# Altium PCB Copy of LMS.PcbDoc
Units mm, origin at the board's own origin, x right, y up, seen from the top; angles counter-clockwise.
Board outline 152.4 x 101.6 mm, 2 copper layers (Top Layer, Bottom Layer); 29 components, 25 nets, 119 pads, 22 vias.
Unrouted connection lines stored in the file: 31.
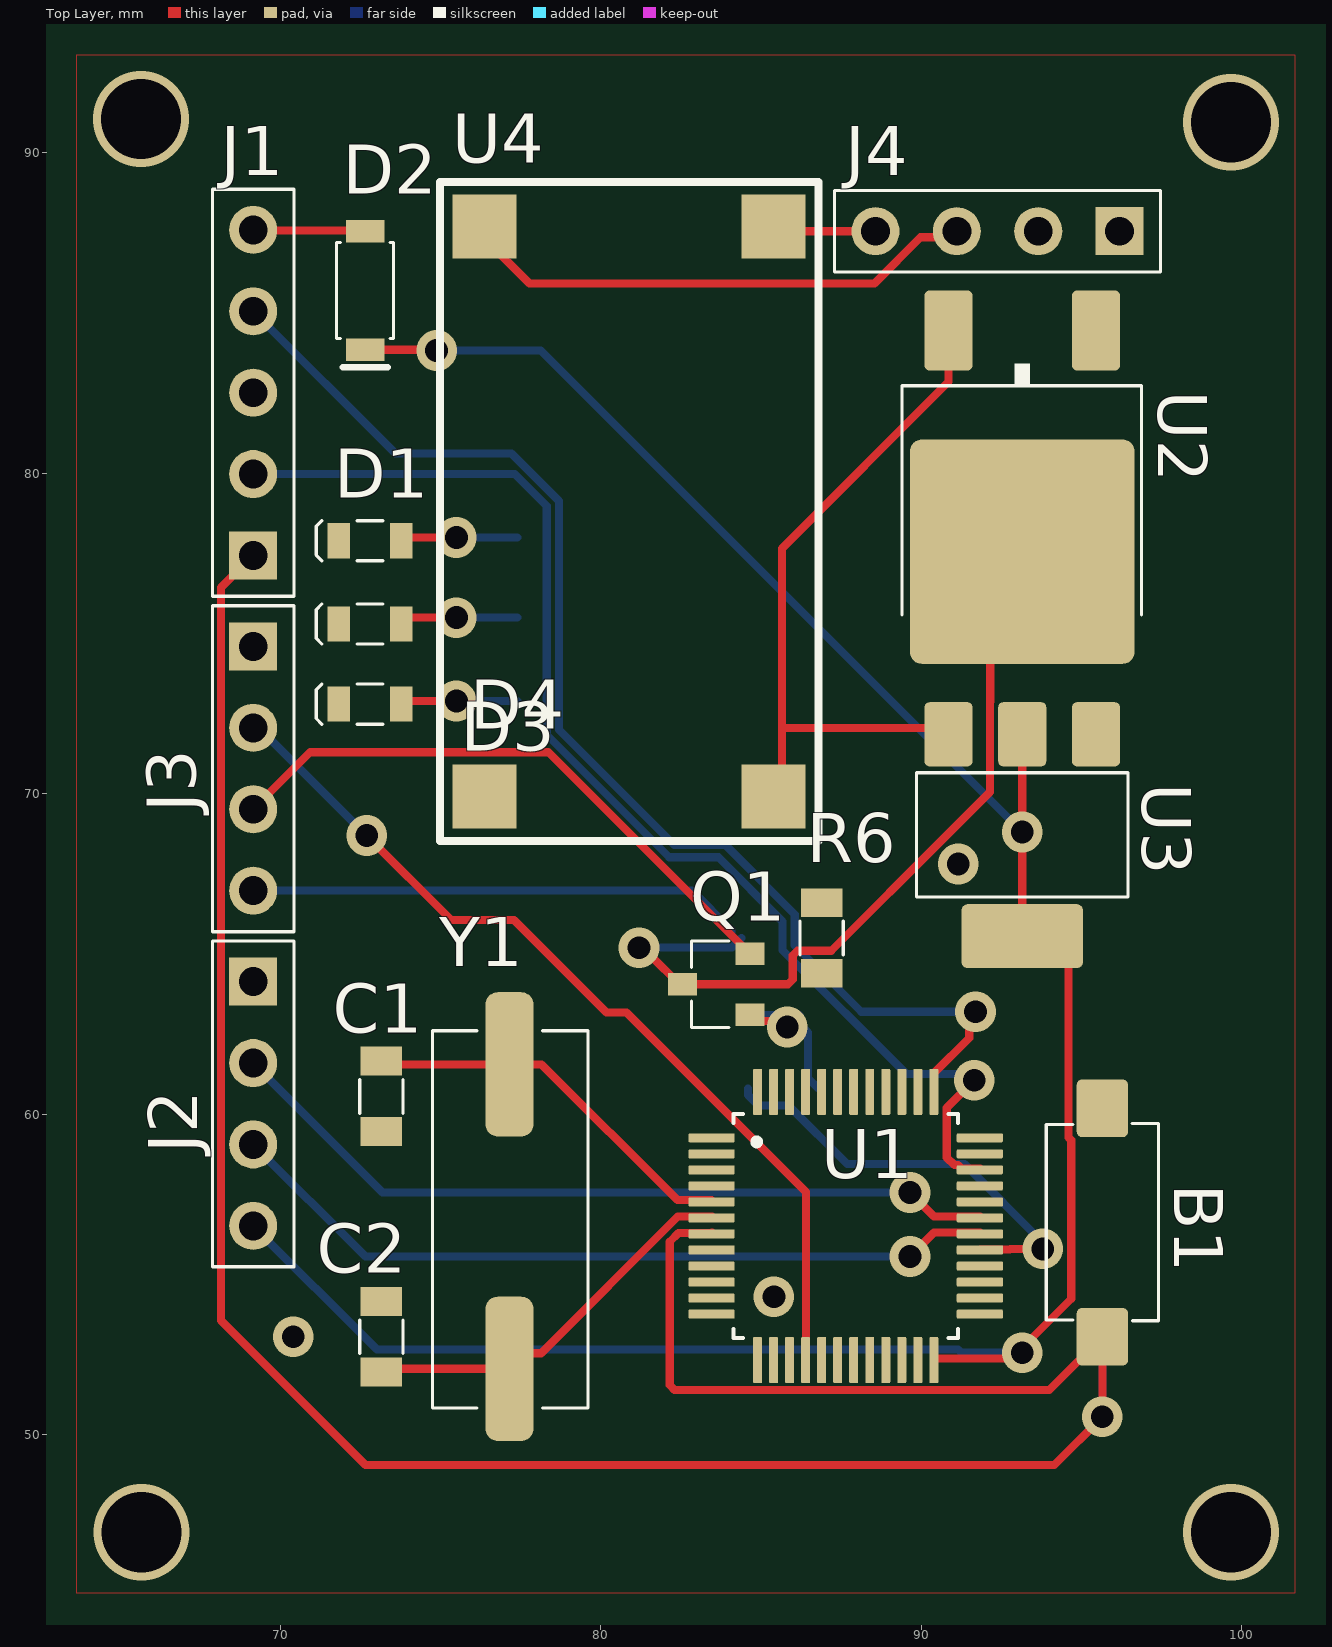
[diagram p0: Top Layer view]
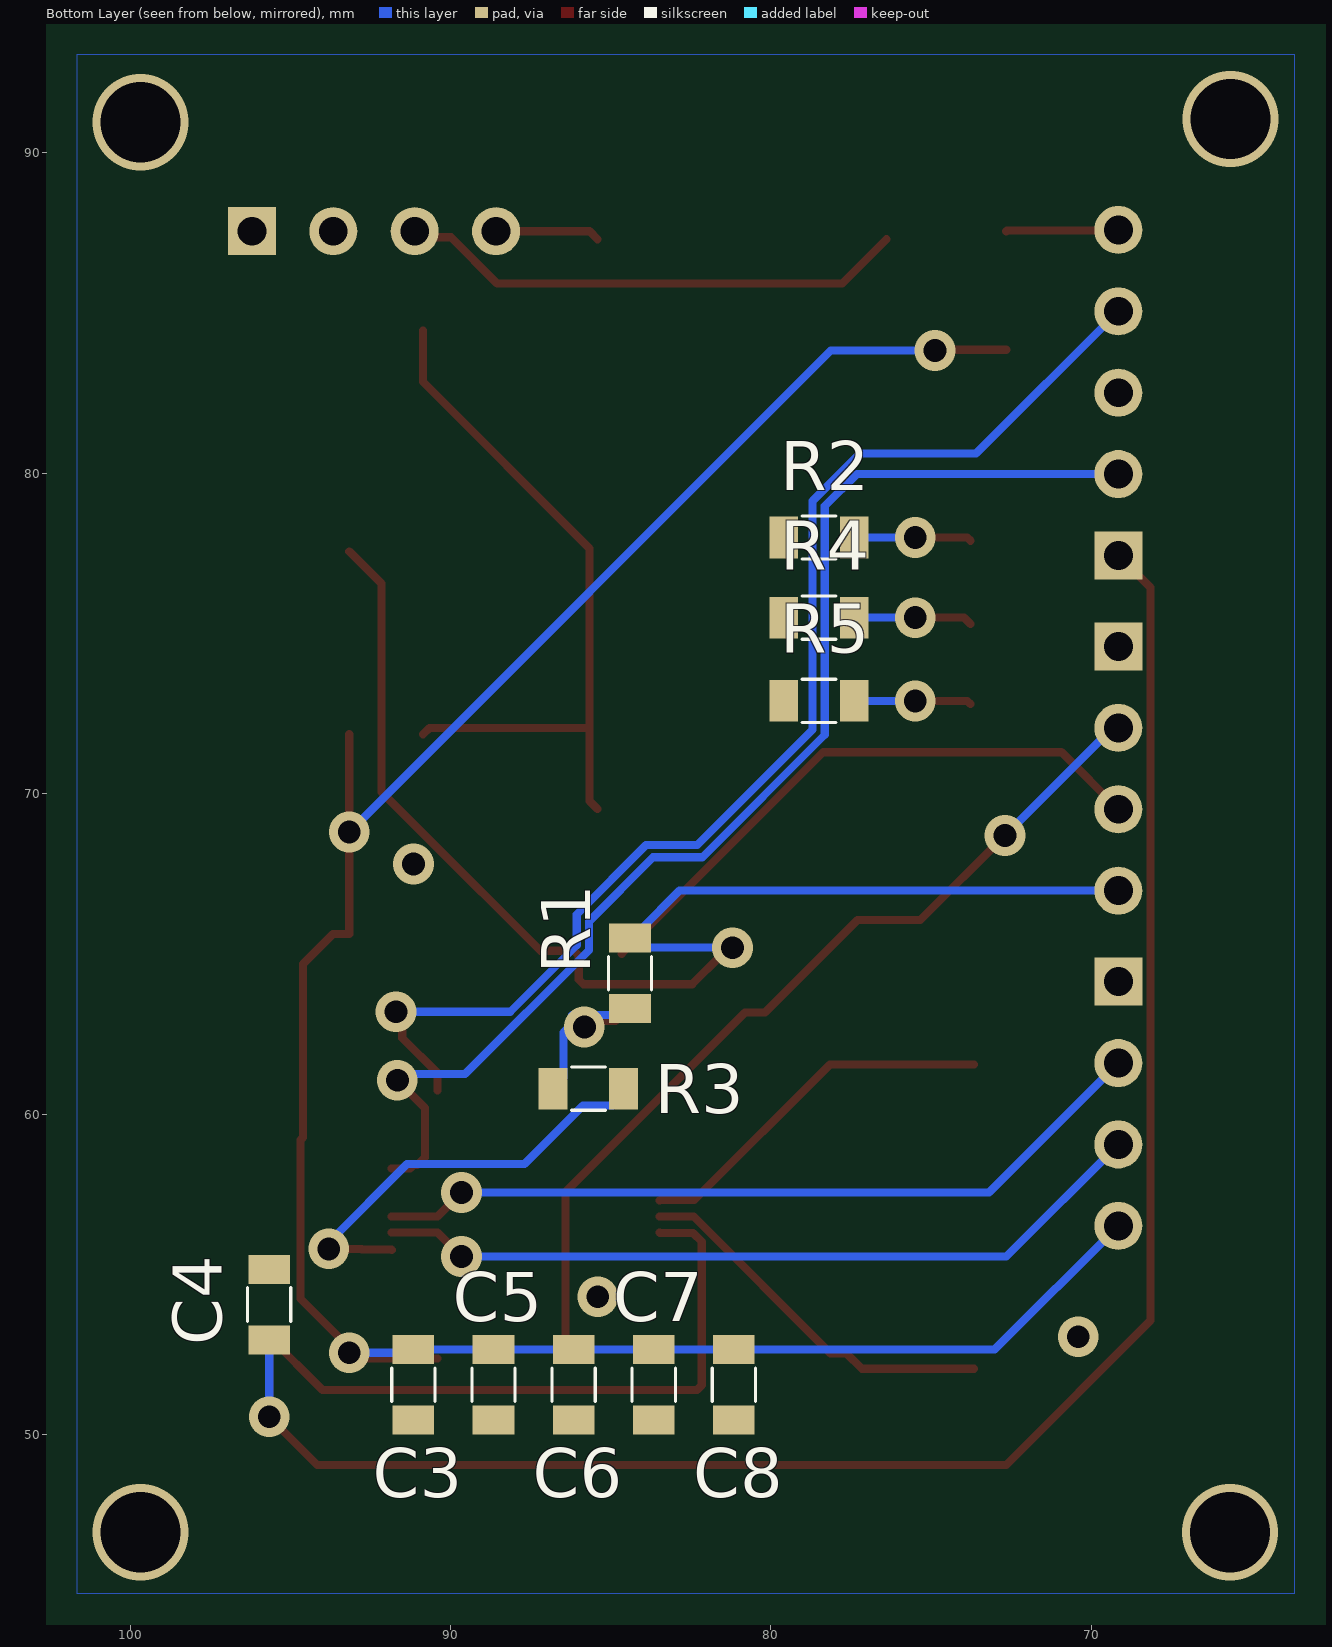
[diagram p1: Bottom Layer view, seen from below]

## Layer stack, top to bottom
Top Solder: solder mask 0.0102, Solder Resist, Dk 3.5
Top Layer: signal copper 0.0356
Dielectric 1: dielectric 0.32, FR-4, Dk 4.8
Bottom Layer: signal copper 0.0356
Bottom Solder: solder mask 0.0102, Solder Resist, Dk 3.5

## Board outline
25.4,25.4 177.8,25.4 177.8,127 25.4,127

## Design rules (kind name [scope] priority, off if disabled: settings)
AcuteAngle [All] p1: minimum=3.50000000000000E+0001 checktracksonly=FALSE
BoardOutlineClearance "BoardOutlineClearance 1" [All] p1: gap=0.25 ignorepadtopadclearanceinfootprint=FALSE except(0: Arc-SplitContinuation Track-SplitContinuation SMDPad-SplitContinuation THPad-SplitContinuation Via-SplitContinuation Fill-SplitContinuation Poly-SplitContinuation Region-SplitContinuation Text-SplitContinuation) // Milling
Clearance "Clearance-1 1/2 Oz" [All] p1: gap=0.125 ignorepadtopadclearanceinfootprint=FALSE except(0.2: Arc-Fill Arc-Poly Track-Fill Track-Poly SMDPad-SMDPad SMDPad-Fill SMDPad-Poly THPad-Fill THPad-Poly Via-Fill Via-Poly Fill-Fill Fill-Poly Poly-Poly Poly-Region Poly-Text; 0.25: Arc-Hole Track-Hole SMDPad-Hole THPad-Hole Via-Hole Fill-Hole Poly-Hole Region-Hole Text-Hole) // Standart
ComponentClearance [All] p1: gap=0.1 collisioncheckmode=3 verticalgap=0.1 showdistances=FALSE
DiffPairsRouting "DiffPairsRouting 1/2 Oz" [All] p1: maxlimit=0.254 minlimit=0.125 mostfreqgap=0.254 toplayer_minwidth=0.125 toplayer_maxwidth=0.381 toplayer_prefwidth=0.381 bottomlayer_minwidth=0.125 bottomlayer_maxwidth=0.381 bottomlayer_prefwidth=0.381 maxuncoupledlength=12.7
HoleSize "Minimum HoleSize" [IsPad] p1: absolutevalues=TRUE maxlimit=5.9 minlimit=0.6 maxpercent=80.000 minpercent=20.000
HoleSize "Minimum HoleSize VIA 1" [IsVia] p2: absolutevalues=TRUE maxlimit=5.9 minlimit=0.3 maxpercent=80.000 minpercent=20.000 // Standart
HoleToHoleClearance Hole2HoleClearance [All] p1: gap=0.25 allowstackedmicrovias=FALSE
MinimumAnnularRing "Minimum AR VIA Standart" [All] p1: minimumring=0.15
MinimumAnnularRing "Minimum AR PAD Standart" [All] p2: minimumring=0.2
MinimumSolderMaskSliver "SolderMask Bridge Standart" [All] p1: minsoldermaskwidth=0.15 // All Masks
PlaneClearance "PlaneClearance-1 1/2 Oz" [All] p1: clearance=0.2 // Standart
PlaneConnect "TermalConnect-1 1/2 Oz" [All] p1: planeconnectstyle=Relief reliefexpansion=0.2 reliefentries=4 reliefconductorwidth=0.2 reliefairgap=0.2 // Standart
PolygonConnect "PolygonConnect-1 1/2 Oz" [All] p1: thpad.connectstyle=Relief thpad.reliefconductorwidth=0.254 thpad.reliefentries=4 thpad.polygonreliefangle="90 Angle" thpad.airgapwidth=0.2 smdpad.connectstyle=Relief smdpad.reliefconductorwidth=0.254 smdpad.reliefentries=4 smdpad.polygonreliefangle="90 Angle" smdpad.airgapwidth=0.2 via.connectstyle=Direct via.reliefconductorwidth=0.254 via.reliefentries=4 via.polygonreliefangle="90 Angle" via.airgapwidth=0.254 // Standart
RoutingCorners [All] p1 off: cornerstyle=45-Degree minsetback=2.54 maxsetback=2.54
RoutingVias [All] p1: holewidth=0.4 width=0.8 viastyle="Through Hole" minholewidth=0.3 minwidth=0.6 maxholewidth=5.9 maxwidth=8.9
SilkToSilkClearance Silk2SilkClearance [All] p1 off: silktosilkclearance=0.15
SilkToSolderMaskClearance Silk2SolderMaskClearance [IsPad] p1 off: minsilkscreentomaskgap=0.15 clearancetoexposedcopper=TRUE
SolderMaskExpansion SolderMaskExpansion-1 [All] p1: expansion=0.05 istentingtop=FALSE // Standart
UnRoutedNet [All] p1: checkbadconnections=TRUE
Width "Width 1/2 Oz" [All] p1: maxlimit=10 minlimit=0.125 preferedwidth=0.254 checkconnectedcopper=TRUE
19 further rules are at their usual default settings.

## Components (designator, comment, footprint, x,y, rotation, side; value= is the part's Value field where it differs from the comment)
B1 "But" "BUTTON 6x3.5" 95.659,60.184 r0 top
C1 "3.9pF" "0805 Capicator" 73.159,60.559 r90 top
C2 "3.9pF" "0805 Capicator" 73.159,53.059 r270 top
C3 "0.1uF" "0805 Capicator" 91.159,51.559 r90 bottom
C4 "0.1uF" "0805 Capicator" 95.659,54.059 r270 bottom
C5 "0.1uF" "0805 Capicator" 88.659,51.559 r90 bottom
C6 "0.1uF" "0805 Capicator" 86.159,51.559 r90 bottom
C7 "0.1uF" "0805 Capicator" 83.659,51.559 r90 bottom
C8 "4.7uF" "0805 Capicator" 81.159,51.559 r90 bottom
D1 "LedG" "0805 Led" 72.8,77.9 r180 top
D2 "Diode" sod-123 72.659,87.559 r270 top
D3 "LedY" "0805 Led" 72.8,75.3 r180 top
D4 "LedR" "0805 Led" 72.8,72.8 r180 top
J1 "PLS 5x1" "PLS 5x1" 69.159,77.439 r90 top
J2 "PLS 4x1" "PLS 4x1" 69.159,64.139 r270 top
J3 "PLS 4x1" "PLS 4x1" 69.159,74.599 r270 top
J4 "PLS 4x1" "PLS 4x1" 96.199,87.559 r180 top
Q1 "MOSFET-P" SOT-23 84.659,63.109 r90 top
R1 "10k" "0805 Resistor" 84.4,64.4 r90 bottom
R2 "300" "0805 Resistor" 78.5,78 r180 bottom
R3 "20" "0805 Resistor" 85.7,60.8 r0 bottom
R4 "300" "0805 Resistor" 78.5,75.5 r180 bottom
R5 "300" "0805 Resistor" 78.5,72.9 r180 bottom
R6 "3.9k" "0805 Resistor" 86.9,65.5 r270 top
U1 "STM32F103C6T6" STM32F103C6T6 87.65,56.515 r0 top
U2 "LDO 5V" TO-252 93.159,84.459 r180 top
U3 "LDO 3.3V" SOT-223 93.159,71.859 r180 top
U4 "DC-DC" DC-DC 81.145,79.953 r270 top
Y1 "8MHz" hc-49sm 77.159,52.059 r90 top

## Footprints (in the part's own frame and the unit in brackets; to place one, negate y for a bottom-side part, rotate by r counter-clockwise, add the part's x,y. Pads: shape width x height; smd on the part's side, far side on the other; paste and mask are expansions set on the pad)
"0805 Capicator" [mm]
  rect 0.9x1.3 smd: 1(-1.1,0) 2(1.1,0)
  silkscreen extent -0.53,-0.67 0.53,0.67, body extent -1.05,-0.67 1.05,0.68, height 0.75
"0805 Led" [mm]
  rect 0.7x1.1 smd: 1(-0.975,0) 2(0.975,0)
  silkscreen extent -0.4,-0.63 1.68,0.63, body extent -1.01,-0.62 1.01,0.62, height 1.1
"0805 Resistor" [mm]
  rect 0.9x1.3 smd: 1(-1.1,0) 2(1.1,0)
  silkscreen extent -0.53,-0.67 0.53,0.67, body extent -1.05,-0.67 1.05,0.68, height 0.6
"BUTTON 6x3.5" [mm]
  rrect20% 1.6x1.8 smd: 1(0,0) 2(0,-7.125)
  silkscreen extent -1.75,-6.63 1.75,-0.48, body extent -1.75,-7.52 1.75,0.48, height 4.3
DC-DC [mm]
  rect 2x2 smd: 1(-7.747,4.254) 2(-7.747,-4.763) 3(10.033,4.255) 4(10.033,-4.762)
  silkscreen extent -9.14,-6.16 11.43,5.65
hc-49sm [mm]
  rrect50% 4.5x1.5 smd: 1(0,0) 2(9.5,0)
  silkscreen extent -1.23,-2.45 10.55,2.4, body extent -1.7,-2.44 11.1,2.39
"PLS 4x1" [mm] "Connector; Header; 5 Position"
  rect 1.5x1.5 hole 0.9: 1(0,0)
  round 1.5 hole 0.9: 2(2.54,0) 3(5.08,0) 4(7.62,0)
  silkscreen extent -1.27,-1.27 8.9,1.27, body extent -1.27,-1.3 8.89,1.24, height 8.6
"PLS 5x1" [mm] "Connector; Header; 5 Position"
  rect 1.5x1.5 hole 0.9: 1(0,0)
  round 1.5 hole 0.9: 2(2.54,0) 3(5.08,0) 4(7.62,0) 5(10.16,0)
  silkscreen extent -1.27,-1.27 11.43,1.27, body extent -1.28,-1.28 11.42,1.26, height 8.54
sod-123 [mm]
  rect 0.7x1.2 smd: 1(0,0) 2(3.7,0)
  silkscreen extent 0.35,-0.9 4.25,0.87, body extent 0,-0.8 3.7,0.8
SOT-23 [mm]
  rect 0.7x0.9 smd: 1(0,0) 2(1.9,0) 3(0.95,2.1)
  silkscreen extent -0.4,0.65 2.3,1.83, body extent -0.55,-0.17 2.45,2.23, height 1.1
SOT-223 [mm]
  rrect20% 1.5x2 smd: 1(-2.3,0) 2(0,0) 3(2.3,0)
  rrect20% 3.8x2 smd: 2(0,6.3)
  silkscreen extent -3.3,1.2 3.3,5.07, body extent -3.25,-0.23 3.25,6.73, height 1.7
STM32F103C6T6 [mm]
  rrect25% 1.44x0.28 smd: 1(-4.185,2.75) 2(-4.185,2.25) 3(-4.185,1.75) 4(-4.185,1.25) 5(-4.185,0.75) 6(-4.185,0.25) 7(-4.185,-0.25) 8(-4.185,-0.75) 9(-4.185,-1.25) 10(-4.185,-1.75) 11(-4.185,-2.25) 12(-4.185,-2.75) 25(4.185,-2.75) 26(4.185,-2.25) 27(4.185,-1.75) 28(4.185,-1.25) 29(4.185,-0.75) 30(4.185,-0.25) 31(4.185,0.25) 32(4.185,0.75) 33(4.185,1.25) 34(4.185,1.75) 35(4.185,2.25) 36(4.185,2.75)
  rrect25% 0.28x1.44 smd: 13(-2.75,-4.185) 14(-2.25,-4.185) 15(-1.75,-4.185) 16(-1.25,-4.185) 17(-0.75,-4.185) 18(-0.25,-4.185) 19(0.25,-4.185) 20(0.75,-4.185) 21(1.25,-4.185) 22(1.75,-4.185) 23(2.25,-4.185) 24(2.75,-4.185) 37(2.75,4.185) 38(2.25,4.185) 39(1.75,4.185) 40(1.25,4.185) 41(0.75,4.185) 42(0.25,4.185) 43(-0.25,4.185) 44(-0.75,4.185) 45(-1.25,4.185) 46(-1.75,4.185) 47(-2.25,4.185) 48(-2.75,4.185)
  silkscreen extent -3.5,-3.5 3.5,3.5, body extent -4.5,-4.5 4.5,4.5, height 0.72
TO-252 [mm]
  rrect20% 1.5x2.5 smd: 1(-2.3,0) 3(2.3,0)
  rrect10% 7x7 smd: 2(0,6.9)
  silkscreen extent -3.72,1.02 3.75,8.87, body extent -3.38,-0.65 3.35,9.45, height 2.37

## Part data
B1: library part Button, "Button 2 Conn SMD"
C1 C2: library part "Cap 39pF"
C3 C4 C5 C6 C7: library part "Cap 0.1uF"
C8: library part "Cap 4.7uF"
D1: library part "Led Green"
D2: library part "Diode Schottky", "0.5 A, Low Forward Voltage less than 385 mV, 400 mW Power Dissipation Package"
D3: library part "Led Yellow"
D4: library part "Led Red"
J1: library part "Conn 5", "Header, 5-Pin"
J2 J3 J4: library part "Conn 4", "Header, 4-Pin"
Q1: "P-Channel Power MOSFET 12V to 20V, Infineon"
R1: library part "Res 10k"
R2 R4 R5: library part "Res 300"
R3: library part "Res 20"
R6: library part "Res 3.9k"
U2: "LDO Regulator Pos 5V 1A"
U3: "LDO Regulator Pos 3.3V 1.3A 4-Pin(3+Tab) SOT-223 T/R"
Y1: library part "Crystal 8MHz", "Crystal. HC-49SM (US)"

## Via types
v1: diameter 1.27, hole 0.711, Top Layer to Bottom Layer, 18 vias
v2: diameter 3, hole 2.5, Top Layer to Bottom Layer, 4 vias

## Nets (pads, with @x,y where several pads share a name; then routed paths per layer and width w, separated by ;. In a path a pad name is that pad's centre, name@x,y a point inside that pad or via, vN(x,y) a via of type N, cw(c..) or ccw(c..) an arc to the next point about the centre after c; other vN are vias at no path point)
+3.3V: C3.2 C5.2 C6.2 C7.2 C8.2 D2.2 J2.4 U1.24 U3.2 | length 76.1
  Top Layer w0.254: D2.2 74.859,83.859 v1@74.909,83.809 ; U1.24@90.409,52.374 92.974,52.374 v1(93.159,52.559) 93.159,52.716 94.687,54.244 94.687,59.193 94.607,59.273 94.607,64.692 93.667,65.631 93.159,65.631 v1(93.159,68.809) U3.2@93.159,71.859
  Bottom Layer w0.254: J2.4 73.019,52.659 C8.2 C7.2 C6.2 C5.2 C3.2 91.259,52.559 v1(93.159,52.559) ; v1(74.884,83.834) 78.134,83.834 v1(93.159,68.809)
+5V: J3.4 Q1.3 R1.2 U2.2 | length 40.8
  Top Layer w0.254: J3.4 J3.4@69.261,66.877 ; v1@81.559,64.959 82.459,64.059 Q1.3 85.849,64.059 85.998,64.208 85.998,64.954 86.146,65.102 87.198,65.102 90.792,68.696 90.796,68.696 92.157,70.057 92.157,72.876 92.159,72.878 92.159,76.559 U2.2
  Bottom Layer w0.254: J3.4 82.857,66.979 84.079,65.757 R1.2@84.079,65.659 ; v1(81.2,65.2) 84.1,65.2 R1.2
+7.4V: U2.3 U3.3 U4.3 | length 22.5
  Top Layer w0.254: U4.3@85.413,69.526 85.659,69.772 85.659,72.059 ; U3.3 90.659,72.059 85.659,72.059 ; U2.3 90.859,82.859 85.659,77.659 85.659,72.059
+12V: J4.4 U4.1 | length 3.3
  Top Layer w0.254: U4.1@85.413,87.306 85.667,87.559 J4.4
GND: B1.1 C1.1 C2.1 C3.1 C4.1 C5.1 C6.1 C7.1 C8.1 D1.2 D3.2 D4.2 J1.3 J2.1 J3.1 R6.1 U1.8 U1.23 U1.35 U1.47 U2.1 U4.4
GND12: J4.3 U4.2 | length 16
  Top Layer w0.254: U4.2@76.396,87.306 77.777,85.925 88.544,85.925 89.988,87.369 90.929,87.369 J4.3
NetC1_2: C1.2 U1.5 Y1.2 | length 11.6
  Top Layer w0.254: C1.2@73.659,61.559 78.159,61.559 82.396,57.322 83.461,57.322 U1.5@83.474,57.309
NetC2_2: C2.2 U1.6 Y1.1 | length 11.8
  Top Layer w0.254: C2.2@73.659,52.059 Y1.1 77.641,52.541 78.141,52.541 82.409,56.809 U1.6@83.474,56.809
NetD1_1: D1.1 R2.2 | length 3.7
  Top Layer w0.254: D1.1 73.875,78 v1(75.5,78)
  Bottom Layer w0.254: v1(75.5,78) R2.2
NetD2_1: D2.1 J1.5 | length 3.5
  Top Layer w0.254: J1.5 69.179,87.579 72.639,87.579 D2.1
NetD3_1: D3.1 R4.2 | length 3.7
  Top Layer w0.254: D3.1 73.975,75.5 v1(75.5,75.5)
  Bottom Layer w0.254: v1(75.5,75.5) R4.2
NetD4_1: D4.1 R5.2 | length 3.7
  Top Layer w0.254: D4.1 73.875,72.9 v1(75.5,72.9)
  Bottom Layer w0.254: v1(75.5,72.9) R5.2
NetQ1_1: Q1.1 R1.1 R3.2 | length 6.1
  Top Layer w0.254: Q1.1 84.852,62.916 85.63,62.916 v1(85.823,62.723)
  Bottom Layer w0.254: R1.1 84.6,63.1 v1@85.823,63.1 ; v1(85.823,62.723) v1@85.823,63.1 ; R3.2 86.477,61.123 86.477,62.548 86.2,62.825 86.2,63.1 v1@85.823,63.1
NetR2_1: R2.1 U1.18
NetR4_1: R4.1 U1.19
NetR5_1: R5.1 U1.41
NetR6_2: R6.2 U1.44
NRST: B1.2 C4.2 J1.1 U1.7 | length 79.3
  Top Layer w0.254: J1.1 68.157,76.437 68.157,53.561 72.659,49.059 94.159,49.059 v1(95.659,50.559) B1.2 94.001,51.401 82.308,51.401 82.159,51.55 82.159,56.023 82.432,56.296 83.461,56.296 U1.7@83.474,56.309
  Bottom Layer w0.254: v1(95.659,50.559) C4.2
servo_contorl: R3.1 U1.29 | length 13.5
  Top Layer w0.254: U1.29 91.848,55.778 92.762,55.778 92.784,55.8 v1(93.8,55.8)
  Bottom Layer w0.254: R3.1 84.6,60.6 84.923,60.277 85.867,60.277 87.698,58.446 91.354,58.446 93.8,56 v1(93.8,55.8)
servo_contorl_PDM: J3.3 Q1.2 | length 18.8
  Top Layer w0.254: J3.3 70.94,71.3 78.368,71.3 Q1.2
servo_feedback: J3.2 U1.16 | length 28.4
  Top Layer w0.254: v1(72.7,68.7) 75.341,66.059 77.296,66.059 80.183,63.172 80.807,63.172 86.409,57.57 U1.16@86.409,52.374
  Bottom Layer w0.254: J3.2 69.341,72.059 v1(72.7,68.7)
SWCLK: J1.4 U1.37 | length 39.3
  Top Layer w0.254: U1.37@90.409,60.744 90.409,61.289 91.506,62.386 91.506,63.006 v1(91.7,63.2)
  Bottom Layer w0.254: J1.4 73.602,80.616 77.22,80.616 78.7,79.136 78.7,72 82.3,68.4 83.9,68.4 86.06,66.24 86.06,65.276 88.136,63.2 v1(91.7,63.2)
SWDIO: J1.2 U1.34 | length 39
  Top Layer w0.254: v1(91.659,61.059) 90.801,60.201 90.801,58.656 91.04,58.417 91.156,58.417 91.264,58.309 U1.34@91.844,58.309
  Bottom Layer w0.254: J1.2 77.321,79.979 78.321,78.979 78.321,71.843 82.143,68.021 83.679,68.021 85.681,66.019 85.681,65.119 89.547,61.253 91.465,61.253 v1(91.659,61.059)
USART_to_Rasp_RX: J2.2 U1.31 | length 24.7
  Top Layer w0.254: v1(89.659,57.559) 90.409,56.809 U1.31@91.844,56.809
  Bottom Layer w0.254: J2.2 73.199,57.559 v1(89.659,57.559)
USART_to_Rasp_TX: J2.3 U1.30 | length 24.4
  Top Layer w0.254: v1(89.659,55.559) 90.409,56.309 U1.30@91.844,56.309
  Bottom Layer w0.254: J2.3 72.659,55.559 v1(89.659,55.559)
pads on no net: J4.1 J4.2 U1.1 U1.2 U1.3 U1.4 U1.9 U1.10 U1.11 U1.12 U1.13 U1.14 U1.15 U1.17 U1.20 U1.21 U1.22 U1.25 U1.26 U1.27 U1.28 U1.32 U1.33 U1.36 U1.38 U1.39 U1.40 U1.42 U1.43 U1.45 U1.46 U1.48 U3.1
copper on no net:
  other v1: 70.409,53.059 85.409,54.309 91.159,67.809
  other v2: 65.675,46.957 99.675,46.957 99.675,90.957 65.659,91.059

## Polygon pours and split planes (outlines as drawn)
no net on Top Layer "GND_poly_upper" (solid, remove dead copper, shelved, pour order 0): 63.659,45.059 63.659,93.059 101.659,93.059 101.659,45.059
no net on Bottom Layer "GND_poly_lower" (solid, remove dead copper, shelved, pour order 1): 63.659,45.059 63.659,93.059 101.659,93.059 101.659,45.059